# Altium PCB Power_Managment.PcbDoc (part 2 of 2)
Units mm, origin at the board's own origin, x right, y up, seen from the top; angles counter-clockwise.
Board outline 140 x 113 mm, 2 copper layers (Top Layer, Bottom Layer); 140 components, 107 nets, 489 pads, 1171 vias.
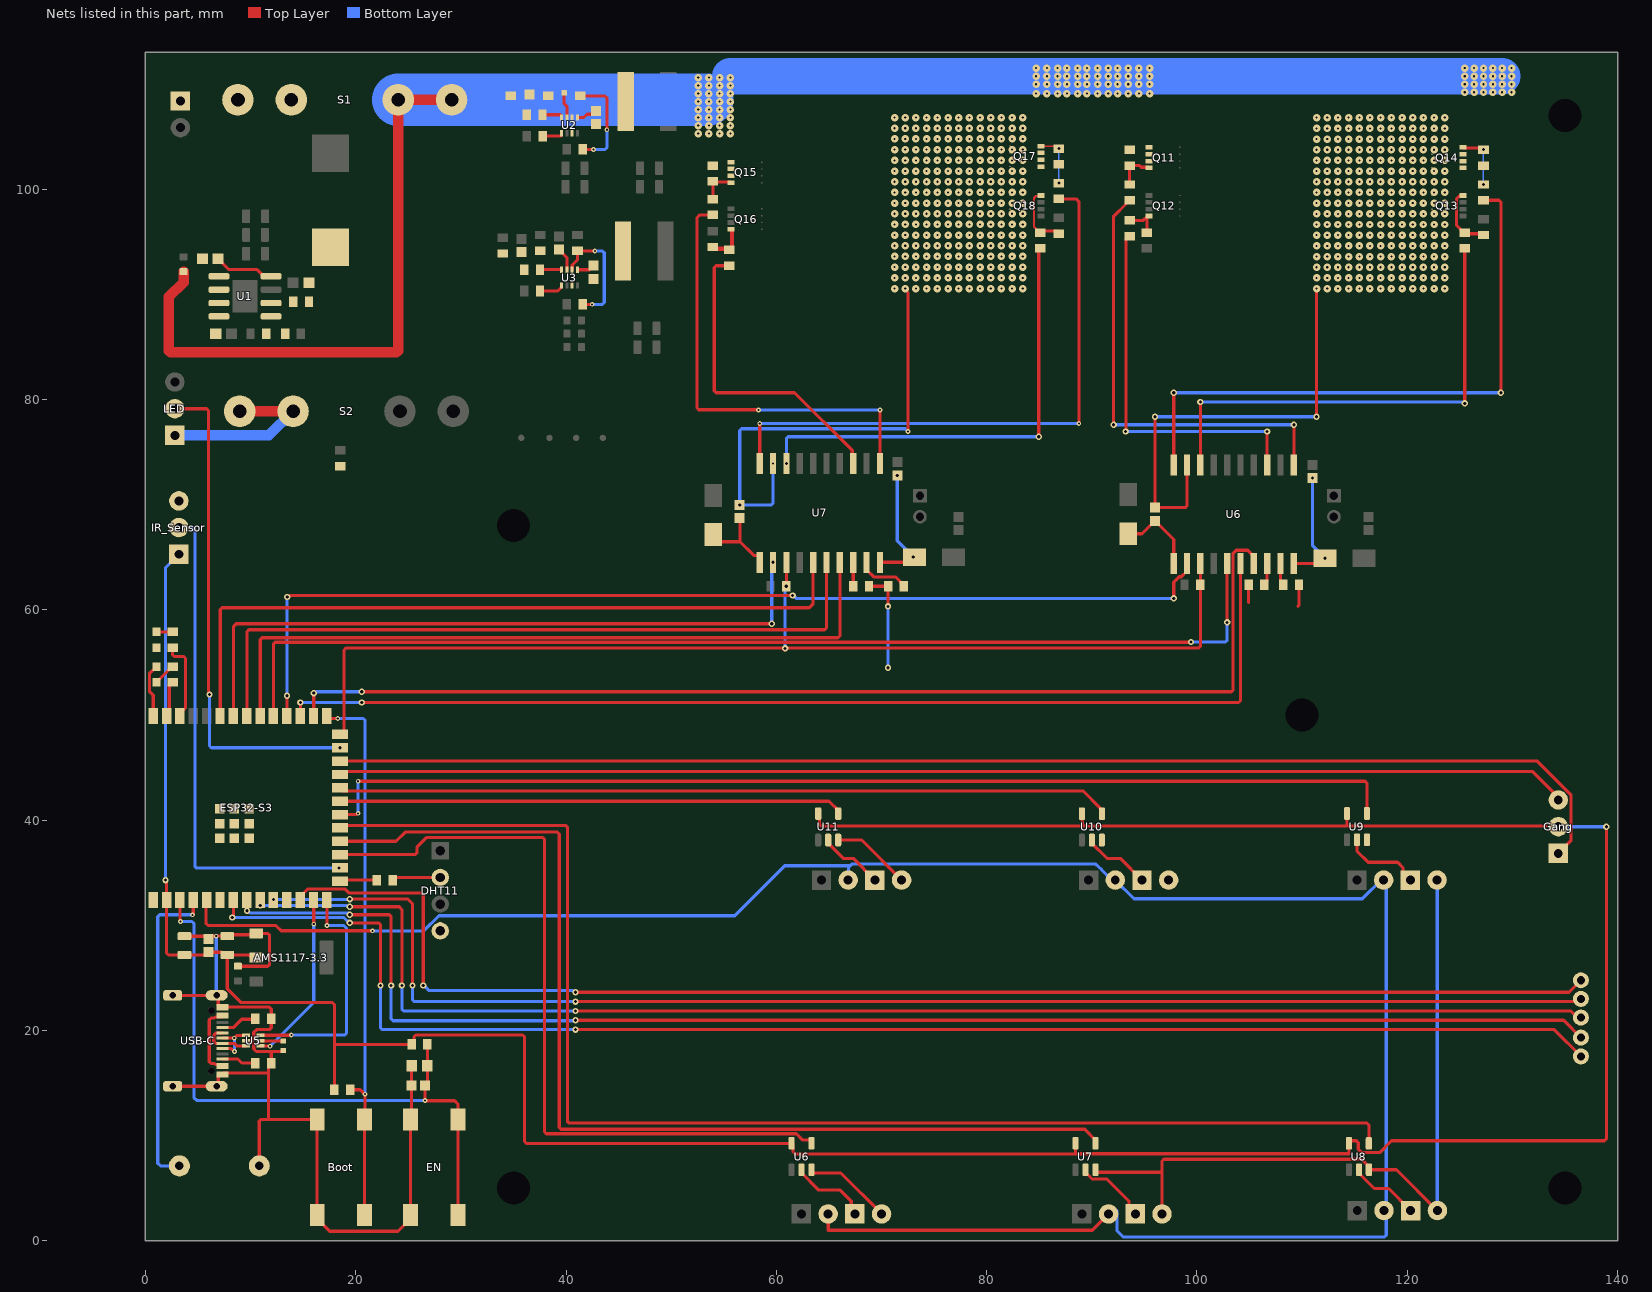
[diagram p2: the nets of this part, all layers, seen from the top]

## Via types
v1: diameter 0.711, hole 0.2, Top Layer to Bottom Layer, 988 vias
v2: diameter 0.45, hole 0.2, Top Layer to Bottom Layer, 96 vias
v3: diameter 0.6, hole 0.3, Top Layer to Bottom Layer, 87 vias

## Nets (pads, with @x,y where several pads share a name; then routed paths per layer and width w, separated by ;. In a path a pad name is that pad's centre, name@x,y a point inside that pad or via, vN(x,y) a via of type N, cw(c..) or ccw(c..) an arc to the next point about the centre after c; other vN are vias at no path point) (continued)
BHS: C43.1 Q13.5 Q13.6 Q13.7 Q13.8 Q14.5 Q14.6 Q14.7 Q14.8 U6.19 | length 43.2
  Top Layer w0.3: v3(96.012,78.359) C43.1@96.012,69.713 98.884,69.713 99.06,69.889 U6.19@99.06,73.789 ; v3(111.379,78.359) v1(111.379,90.544)
  Bottom Layer w0.3: v3(96.012,78.359) v3(111.379,78.359)
  other v1: 112.395,90.544 113.411,90.544 114.427,90.544 115.443,90.544 116.459,90.544 117.475,90.544 118.491,90.544 119.507,90.544 120.523,90.544 121.539,90.544 122.555,90.544 123.571,90.544 111.379,91.56 112.395,91.56 113.411,91.56 114.427,91.56 115.443,91.56 116.459,91.56 117.475,91.56 118.491,91.56 119.507,91.56 120.523,91.56 121.539,91.56 122.555,91.56 123.571,91.56 111.379,92.576 112.395,92.576 113.411,92.576 114.427,92.576 115.443,92.576 116.459,92.576 117.475,92.576 118.491,92.576 119.507,92.576 120.523,92.576 121.539,92.576 122.555,92.576 123.571,92.576 111.379,93.592 112.395,93.592 113.411,93.592 114.427,93.592 115.443,93.592 116.459,93.592 117.475,93.592 118.491,93.592 119.507,93.592 120.523,93.592 121.539,93.592 122.555,93.592 123.571,93.592 111.379,94.608 112.395,94.608 113.411,94.608 114.427,94.608 115.443,94.608 116.459,94.608 117.475,94.608 118.491,94.608 119.507,94.608 120.523,94.608 121.539,94.608 122.555,94.608 123.571,94.608 111.379,95.624 112.395,95.624 113.411,95.624 114.427,95.624 115.443,95.624 116.459,95.624 117.475,95.624 118.491,95.624 119.507,95.624 120.523,95.624 121.539,95.624 122.555,95.624 123.571,95.624 111.379,96.64 112.395,96.64 113.411,96.64 114.427,96.64 115.443,96.64 116.459,96.64 117.475,96.64 118.491,96.64 119.507,96.64 120.523,96.64 121.539,96.64 122.555,96.64 123.571,96.64 111.379,97.656 112.395,97.656 113.411,97.656 114.427,97.656 115.443,97.656 116.459,97.656 117.475,97.656 118.491,97.656 119.507,97.656 120.523,97.656 121.539,97.656 122.555,97.656 123.571,97.656 111.379,98.672 112.395,98.672 113.411,98.672 114.427,98.672 115.443,98.672 116.459,98.672 117.475,98.672 118.491,98.672 119.507,98.672 120.523,98.672 121.539,98.672 122.555,98.672 123.571,98.672 111.379,99.688 112.395,99.688 113.411,99.688 114.427,99.688 115.443,99.688 116.459,99.688 117.475,99.688 118.491,99.688 119.507,99.688 120.523,99.688 121.539,99.688 122.555,99.688 123.571,99.688 111.379,100.704 112.395,100.704 113.411,100.704 114.427,100.704 115.443,100.704 116.459,100.704 117.475,100.704 118.491,100.704 119.507,100.704 120.523,100.704 121.539,100.704 122.555,100.704 123.571,100.704 111.379,101.72 112.395,101.72 113.411,101.72 114.427,101.72 115.443,101.72 116.459,101.72 117.475,101.72 118.491,101.72 119.507,101.72 120.523,101.72 121.539,101.72 122.555,101.72 123.571,101.72 111.379,102.736 112.395,102.736 113.411,102.736 114.427,102.736 115.443,102.736 116.459,102.736 117.475,102.736 118.491,102.736 119.507,102.736 120.523,102.736 121.539,102.736 122.555,102.736 123.571,102.736 111.379,103.752 112.395,103.752 113.411,103.752 114.427,103.752 115.443,103.752 116.459,103.752 117.475,103.752 118.491,103.752 119.507,103.752 120.523,103.752 121.539,103.752 122.555,103.752 123.571,103.752 111.379,104.768 112.395,104.768 113.411,104.768 114.427,104.768 115.443,104.768 116.459,104.768 117.475,104.768 118.491,104.768 119.507,104.768 120.523,104.768 121.539,104.768 122.555,104.768 123.571,104.768 111.379,105.784 112.395,105.784 113.411,105.784 114.427,105.784 115.443,105.784 116.459,105.784 117.475,105.784 118.491,105.784 119.507,105.784 120.523,105.784 121.539,105.784 122.555,105.784 123.571,105.784 111.379,106.8 112.395,106.8 113.411,106.8 114.427,106.8 115.443,106.8 116.459,106.8 117.475,106.8 118.491,106.8 119.507,106.8 120.523,106.8 121.539,106.8 122.555,106.8 123.571,106.8
BHS1: C57.1 Q17.5 Q17.6 Q17.7 Q17.8 Q18.5 Q18.6 Q18.7 Q18.8 U7.19 | length 44
  Top Layer w0.3: C57.1@56.515,69.967 v3(56.515,69.977) ; v1(72.263,90.551) 72.263,90.44 72.517,90.186 v2(72.517,76.962)
  Bottom Layer w0.3: v2(59.69,73.914) 59.69,70.153 59.514,69.977 v3(56.515,69.977) 56.515,77.04 56.691,77.216 72.263,77.216 v2(72.517,76.962)
  other v1: 71.247,90.551 73.279,90.551 74.295,90.551 75.311,90.551 76.327,90.551 77.343,90.551 78.359,90.551 79.375,90.551 80.391,90.551 81.407,90.551 82.423,90.551 83.439,90.551 71.247,91.567 72.263,91.567 73.279,91.567 74.295,91.567 75.311,91.567 76.327,91.567 77.343,91.567 78.359,91.567 79.375,91.567 80.391,91.567 81.407,91.567 82.423,91.567 83.439,91.567 71.247,92.583 72.263,92.583 73.279,92.583 74.295,92.583 75.311,92.583 76.327,92.583 77.343,92.583 78.359,92.583 79.375,92.583 80.391,92.583 81.407,92.583 82.423,92.583 83.439,92.583 71.247,93.599 72.263,93.599 73.279,93.599 74.295,93.599 75.311,93.599 76.327,93.599 77.343,93.599 78.359,93.599 79.375,93.599 80.391,93.599 81.407,93.599 82.423,93.599 83.439,93.599 71.247,94.615 72.263,94.615 73.279,94.615 74.295,94.615 75.311,94.615 76.327,94.615 77.343,94.615 78.359,94.615 79.375,94.615 80.391,94.615 81.407,94.615 82.423,94.615 83.439,94.615 71.247,95.631 72.263,95.631 73.279,95.631 74.295,95.631 75.311,95.631 76.327,95.631 77.343,95.631 78.359,95.631 79.375,95.631 80.391,95.631 81.407,95.631 82.423,95.631 83.439,95.631 71.247,96.647 72.263,96.647 73.279,96.647 74.295,96.647 75.311,96.647 76.327,96.647 77.343,96.647 78.359,96.647 79.375,96.647 80.391,96.647 81.407,96.647 82.423,96.647 83.439,96.647 71.247,97.663 72.263,97.663 73.279,97.663 74.295,97.663 75.311,97.663 76.327,97.663 77.343,97.663 78.359,97.663 79.375,97.663 80.391,97.663 81.407,97.663 82.423,97.663 83.439,97.663 71.247,98.679 72.263,98.679 73.279,98.679 74.295,98.679 75.311,98.679 76.327,98.679 77.343,98.679 78.359,98.679 79.375,98.679 80.391,98.679 81.407,98.679 82.423,98.679 83.439,98.679 71.247,99.695 72.263,99.695 73.279,99.695 74.295,99.695 75.311,99.695 76.327,99.695 77.343,99.695 78.359,99.695 79.375,99.695 80.391,99.695 81.407,99.695 82.423,99.695 83.439,99.695 71.247,100.711 72.263,100.711 73.279,100.711 74.295,100.711 75.311,100.711 76.327,100.711 77.343,100.711 78.359,100.711 79.375,100.711 80.391,100.711 81.407,100.711 82.423,100.711 83.439,100.711 71.247,101.727 72.263,101.727 73.279,101.727 74.295,101.727 75.311,101.727 76.327,101.727 77.343,101.727 78.359,101.727 79.375,101.727 80.391,101.727 81.407,101.727 82.423,101.727 83.439,101.727 71.247,102.743 72.263,102.743 73.279,102.743 74.295,102.743 75.311,102.743 76.327,102.743 77.343,102.743 78.359,102.743 79.375,102.743 80.391,102.743 81.407,102.743 82.423,102.743 83.439,102.743 71.247,103.759 72.263,103.759 73.279,103.759 74.295,103.759 75.311,103.759 76.327,103.759 77.343,103.759 78.359,103.759 79.375,103.759 80.391,103.759 81.407,103.759 82.423,103.759 83.439,103.759 71.247,104.775 72.263,104.775 73.279,104.775 74.295,104.775 75.311,104.775 76.327,104.775 77.343,104.775 78.359,104.775 79.375,104.775 80.391,104.775 81.407,104.775 82.423,104.775 83.439,104.775 71.247,105.791 72.263,105.791 73.279,105.791 74.295,105.791 75.311,105.791 76.327,105.791 77.343,105.791 78.359,105.791 79.375,105.791 80.391,105.791 81.407,105.791 82.423,105.791 83.439,105.791 71.247,106.807 72.263,106.807 73.279,106.807 74.295,106.807 75.311,106.807 76.327,106.807 77.343,106.807 78.359,106.807 79.375,106.807 80.391,106.807 81.407,106.807 82.423,106.807 83.439,106.807
BOOT: Boot.1 Boot.2 ESP32-S3.27 R23.2 | length 52.5
  Top Layer w0.3: ESP32-S3.27@17.25,49.908 17.495,49.663 v2(18.288,49.663) ; R23.2@19.464,14.351 20.419,14.351 20.84,13.93 v2(20.881,13.93) 20.881,11.591 Boot.1@20.825,11.535 Boot.2@20.825,2.435
  Bottom Layer w0.3: v2(18.288,49.663) 20.705,49.663 20.881,49.487 v2(20.881,13.93)
"D 3V3": AMS1117-3.3.2 C26.2 C27.2 C28.2 ESP32-S3.2 Gang.2 IR_Sensor.1 R22.1 R23.1 U6.5@61.45,9.255 U7.5@88.45,9.255 U8.5 U9.5 U10.5 U11.5 | length 313.4
  Top Layer w0.3: v3(1.905,34.29) 1.905,34.209 2.01,34.104 ESP32-S3.2@2.01,32.408 2.01,27.342 2.186,27.166 C27.2@3.716,27.166 5.736,27.166 C28.2@6.002,27.432 7.255,27.432 7.51,27.177 C26.2@7.78,27.177 ; AMS1117-3.3.2@10.531,26.67 10.341,26.67 9.834,27.177 C26.2@7.78,27.177 ; R23.1@17.964,14.351 17.964,18.636 ; U11.5@63.98,40.61 64.11,40.48 64.11,39.602 64.286,39.427 113.836,39.427 113.847,39.438 114.127,39.438 ; U7.5@88.45,9.255 88.45,8.28 88.425,8.255 ; 89.06,39.915 U10.5@89.06,40.61 ; 89.111,39.546 89.111,39.864 ; U9.5@114.272,40.625 114.272,39.583 114.127,39.438 ; Gang.2@133.985,39.624 133.799,39.438 114.127,39.438 ; v3(138.938,39.37) 138.938,9.676 138.762,9.5 118.5,9.5 117.373,8.373 115.678,8.373 115.345,8.706 115.345,9.324 115.169,9.5 114.595,9.5 114.45,9.355 114.45,8.265 88.91,8.265 88.9,8.255 88.425,8.255 ; C26.2@7.78,27.177 7.78,23.97 9.11,22.64 17.788,22.64 17.964,22.464 17.964,18.636 ; 17.964,18.636 17.997,18.669 R22.1@25.318,18.669 25.541,18.892 25.541,19.382 25.717,19.558 35.874,19.558 36.05,19.382 36.05,9.431 36.226,9.255 U6.5@61.45,9.255 61.595,9.11 61.595,8.431 61.771,8.255 88.425,8.255
  Bottom Layer w0.3: v3(1.905,34.29) 1.905,64.008 IR_Sensor.1@3.175,65.278 ; Gang.2@134.366,39.37 v3(138.938,39.37)
D+: U5.1 USB-C.A6 USB-C.B6 | length 4.8
  Top Layer w0.3: USB-C.B6@7.344,18.259 8.149,18.259 8.425,17.983 v2(8.466,17.983) ; USB-C.A6@7.344,19.259 v2@8.441,19.259 ; v2@8.442,19.26 8.703,19.521 U5.1@9.575,19.521
  Bottom Layer w0.3: v2@8.453,17.996 v2@8.453,19.249
  other v2: 8.441,19.261
D++: ESP32-S3.14 U5.6 | length 22.6
  Top Layer w0.3: U5.6@10.955,19.521 10.974,19.539 13.857,19.539 v2(13.876,19.558) ; ESP32-S3.14@17.25,32.408 17.25,29.994 v2(17.272,29.972)
  Bottom Layer w0.3: v2(13.876,19.558) 18.946,19.558 19.122,19.734 19.122,29.719 18.869,29.972 v2(17.272,29.972)
D-: U5.3 USB-C.A7 USB-C.B7 | length 4.8
  Top Layer w0.3: USB-C.B7@7.344,19.759 6.727,19.759 6.492,19.524 6.492,18.96 6.693,18.759 8.44,18.759 8.678,18.521 U5.3@9.575,18.521
D--: ESP32-S3.13 U5.4 | length 16.6
  Top Layer w0.3: U5.4@10.955,18.521 10.97,18.506 11.828,18.506 v2(11.844,18.49) ; ESP32-S3.13@15.98,32.408 16.002,32.386 v2(16.002,30.099)
  Bottom Layer w0.3: v2(11.844,18.49) 16.002,22.648 v2(16.002,30.099)
DGND: AMS1117-3.3.1 Boot.3 Boot.4 C23.2 C24.2 C25.1 C26.1 C27.1 C28.1 C29.1 D1.2 D2.2 DHT11.4 EN.3 EN.4 ESP32-S3.1 ESP32-S3.40 ESP32-S3.41 ESP32-S3.42 ESP32-S3.43 ESP32-S3.44 ESP32-S3.45 ESP32-S3.46 ESP32-S3.47 ESP32-S3.48 ESP32-S3.49 IR_Sensor.3 J2.2 J4.2 J6.2 J8.2 J10.2 J12.2 LS1.N R01.1 R20.1 R21.2 R40.2 R41.2 R60.2 R61.2 U5.2 U6.3@63.35,6.745 U7.3@90.35,6.745 U8.3 U9.3 U10.3 U11.3 USB-C.A1_B12 USB-C.B1_A12 USB-C.SH1 USB-C.SH2 USB-C.SH3 USB-C.SH4 | length 206.3
  Top Layer w0.3: ESP32-S3.1@0.74,32.408 ESP32-S3.1@0.74,32.708 ; ESP32-S3.40@0.74,49.908 0.74,51.876 0.372,52.244 0.372,53.921 D2.2@1.049,54.598 ; USB-C.SH4@2.589,14.689 USB-C.SH2@6.769,14.689 6.919,14.839 6.919,15.659 7.069,15.809 USB-C.B1_A12@7.344,15.809 7.494,15.959 11.603,15.959 11.717,16.073 ; USB-C.SH3@2.589,23.329 USB-C.SH1@6.769,23.329 6.919,23.179 6.919,22.359 7.069,22.209 11.783,22.209 11.959,22.033 R20.1@11.959,21.082 11.959,20.242 11.783,20.066 10.566,20.066 10.303,19.803 10.303,19.301 9.998,18.996 ; C27.1@3.716,28.956 5.728,28.956 C28.1@6.002,28.682 6.276,28.956 v2(6.731,28.956) ; v2@6.731,28.967 C26.1@7.78,28.967 7.903,29.091 10.408,29.091 AMS1117-3.3.1@10.531,29.214 11.635,29.214 11.811,29.038 11.811,26.289 11.622,26.1 C25.1@8.796,26.1 ; U5.2@9.575,19.021 9.6,18.996 9.998,18.996 ; LS1.N@10.828,7.112 10.828,11.359 11.004,11.535 11.717,11.535 ; C29.1@13.114,18.092 13.014,17.992 12.817,17.992 12.813,17.988 11.959,17.988 ; C23.2@25.343,16.637 25.316,16.61 C24.2@25.316,14.732 25.316,11.636 EN.3@25.215,11.535 EN.4@25.215,2.435 25.215,2.085 24.019,0.889 17.521,0.889 16.325,2.085 Boot.4@16.325,2.435 Boot.3@16.325,11.535 11.717,11.535 ; DHT11.4@27.792,29.222 DHT11.4@28.034,29.464 ; U6.3@63.35,6.745 63.35,6.582 63.495,6.437 66.113,6.437 J2.2@70.01,2.54 ; U11.3@65.88,38.1 68.105,38.1 J10.2@71.915,34.29 ; R60.2@68.81,62.23 R61.2@70.624,62.23 70.618,62.224 70.618,60.331 v3(70.612,60.325) ; U7.3@90.35,6.745 90.35,6.643 90.495,6.498 96.68,6.498 ; J4.2@96.68,2.54 96.68,6.498 ; 104.902,60.706 104.914,60.718 R40.2@104.914,62.357 ; 109.601,60.325 109.704,60.428 R41.2@109.704,62.357 ; J6.2@122.87,2.86 118.985,6.745 U8.3@116.35,6.745 116.35,7.055 115.658,7.747 96.856,7.747 96.68,7.571 96.68,6.498 ; 9.998,18.996 10.021,18.973 10.057,18.973 10.303,18.727 10.303,18.239 10.554,17.988 11.959,17.988 ; 11.717,11.535 11.717,16.073 ; 11.717,16.073 11.717,16.649 R21.2@11.959,16.891 11.959,17.988
  Bottom Layer w0.3: v2(6.731,28.956) 6.731,23.367 USB-C.SH1@6.769,23.329 ; v3(70.612,54.483) v3(70.612,60.325) ; J8.2@122.842,34.29 122.856,34.276 122.856,2.874 J6.2@122.87,2.86
"Echo 1": J2.1 U6.2@62.4,6.745 | length 7.5
  Top Layer w0.3: U6.2@62.4,6.745 62.4,6.435 64.032,4.803 66.064,4.803 67.127,3.739 67.127,2.883 J2.1@67.47,2.54
"Echo 2": J4.1 U7.2@89.4,6.745 | length 7
  Top Layer w0.3: U7.2@89.4,6.745 89.4,6.435 89.545,6.29 89.602,6.29 89.778,6.114 89.778,6.112 90.027,5.863 91.419,5.863 93.543,3.739 93.543,3.137 J4.1@94.14,2.54
"Echo 3": J6.1 U8.2 | length 6.7
  Top Layer w0.3: U8.2@115.4,6.745 115.4,6.435 116.873,4.962 118.228,4.962 J6.1@120.33,2.86
"Echo 4": J8.1 U9.2 | length 7.6
  Top Layer w0.3: U9.2@115.222,38.115 115.222,37.043 116.283,35.982 119.085,35.982 119.596,35.471 119.596,34.996 J8.1@120.302,34.29
"Echo 5": J10.1 U11.2 | length 6.2
  Top Layer w0.3: U11.2@64.93,38.1 64.93,37.79 66.365,36.355 67.31,36.355 J10.1@69.375,34.29
"Echo 6": J12.1 U10.2 | length 6.5
  Top Layer w0.3: U10.2@90.01,38.1 90.01,37.79 91.445,36.355 92.71,36.355 J12.1@94.775,34.29
EN: C23.1 C24.1 EN.1 EN.2 ESP32-S3.3 R22.2 | length 61.4
  Top Layer w0.3: ESP32-S3.3@3.28,32.408 3.28,30.449 3.335,30.394 v2(3.335,30.353) ; R22.2@26.818,18.669 26.818,14.984 C24.1@26.566,14.732 26.576,14.722 v2(26.576,13.335) 26.605,13.306 29.399,13.306 29.715,12.99 EN.2@29.715,2.435
  Bottom Layer w0.3: v2(3.335,30.353) 4.429,30.353 4.605,30.177 4.605,13.603 4.873,13.335 v2(26.576,13.335)
HSA: R47.1 U6.11 | length 43
  Top Layer w0.3: v3(92.075,77.597) 92.075,97.421 93.249,98.595 93.249,98.695 93.499,98.945 R47.1@93.599,98.945 ; U6.11@109.22,73.789 v3(109.22,77.597)
  Bottom Layer w0.3: v3(92.075,77.597) v3(109.22,77.597)
HSA1: R51.1 U7.11 | length 42.3
  Top Layer w0.3: R51.1@53.975,97.56 52.729,97.56 52.451,97.282 52.451,79.198 52.627,79.023 58.264,79.023 v2(58.293,78.994) ; U7.11@69.85,73.915 v2(69.85,78.994)
  Bottom Layer w0.3: v2(58.293,78.994) v2(69.85,78.994)
HSB: R49.2 U6.20 | length 57.8
  Top Layer w0.3: U6.20@97.79,73.789 v3(97.79,80.645) ; R49.2@127.254,98.945 128.729,98.945 128.905,98.769 v3(128.905,80.645)
  Bottom Layer w0.3: v3(97.79,80.645) v3(128.905,80.645)
HSB1: R56.2 U7.20 | length 57.3
  Top Layer w0.3: U7.20@58.42,73.915 v2(58.42,77.718) ; R56.2@86.868,99.072 88.512,99.072 88.773,98.811 v2(88.773,77.724)
  Bottom Layer w0.3: v2(58.42,77.718) 58.423,77.721 88.77,77.721 v2(88.773,77.724)
IO1: ESP32-S3.39 R25.1 | length 3.4
  Top Layer w0.3: ESP32-S3.39@2.264,49.908 2.264,52.848 2.514,53.098 R25.1@2.573,53.098
IO2: ESP32-S3.38 R24.1 | length 7.8
  Top Layer w0.3: R24.1@2.573,56.4 2.573,55.726 2.749,55.55 3.634,55.55 3.81,55.374 3.81,50.684 3.634,50.508 3.58,50.508 3.28,50.208 ESP32-S3.38@3.28,49.908
IO3: ESP32-S3.15 R30.2 | length 3.6
  Top Layer w0.3: ESP32-S3.15@18.5,34.173 18.617,34.29 R30.2@22.004,34.29
IO4: ESP32-S3.4 LS1.P | length 30.4
  Top Layer w0.3: v2(4.478,30.988) 4.478,31.029 4.55,31.101 ESP32-S3.4@4.55,32.408
  Bottom Layer w0.3: LS1.P@3.228,7.112 1.43,7.112 1.176,7.366 1.176,30.812 1.352,30.988 v2(4.478,30.988)
IO6: ESP32-S3.6
IO7: ESP32-S3.7 pad.6 | length 141.2
  Top Layer w0.3: v3(8.255,30.734) 8.255,30.815 8.36,30.92 ESP32-S3.7@8.36,32.408 ; v3(19.431,30.226) 22.176,30.226 22.352,30.05 v3(22.352,24.257) ; v3(40.894,20.066) 133.985,20.066 pad.6@136.525,17.526
  Bottom Layer w0.3: v3(8.255,30.734) 18.869,30.734 19.377,30.226 v3(19.431,30.226) ; v3(22.352,24.257) 22.352,20.242 22.528,20.066 v3(40.894,20.066)
IO8: ESP32-S3.12 pad.2 | length 132
  Top Layer w0.3: ESP32-S3.12@14.71,32.408 14.71,32.708 15.222,33.22 15.222,33.242 15.415,33.435 19.016,33.435 19.397,33.054 26.24,33.054 26.416,32.878 v3(26.416,24.257) ; v3(40.894,23.622) 135.382,23.622 pad.2@136.525,24.765
  Bottom Layer w0.3: v3(26.416,24.257) 26.497,24.257 26.979,23.775 40.659,23.775 40.813,23.622 v3(40.894,23.622)
IO9: ESP32-S3.17 U6.4@63.35,9.255 | length 74.3
  Top Layer w0.3: ESP32-S3.17@18.5,36.713 25.638,36.713 25.814,36.889 25.814,37.406 26.762,38.354 37.774,38.354 37.95,38.178 37.95,10.336 38.126,10.16 61.922,10.16 62.519,9.563 63.205,9.563 63.35,9.417 U6.4@63.35,9.255
IO10: ESP32-S3.18 U7.4@90.35,9.255 | length 101
  Top Layer w0.3: ESP32-S3.18@18.5,37.983 23.825,37.983 24.694,38.851 39.178,38.851 39.354,38.676 39.354,10.763 39.529,10.587 89.328,10.587 90.35,9.565 U7.4@90.35,9.255
IO11: ESP32-S3.19 U8.4 | length 127.9
  Top Layer w0.3: ESP32-S3.19@18.5,39.253 18.744,39.497 39.956,39.497 40.132,39.321 40.132,11.352 40.308,11.176 116.174,11.176 116.35,11 U8.4@116.35,9.255
IO12: ESP32-S3.20 U9.4 | length 103.7
  Top Layer w0.3: ESP32-S3.20@18.5,40.523 20.068,40.523 20.185,40.64 v2(20.226,40.64) ; v2(20.226,43.688) 115.996,43.688 116.172,43.512 U9.4@116.172,40.625
  Bottom Layer w0.3: v2(20.226,40.64) v2(20.226,43.688)
IO13: ESP32-S3.21 U11.4 | length 48.1
  Top Layer w0.3: ESP32-S3.21@18.5,41.793 65.007,41.793 65.88,40.92 U11.4@65.88,40.61
IO14: ESP32-S3.22 U10.4 | length 73.7
  Top Layer w0.3: ESP32-S3.22@18.5,43.063 18.8,42.763 89.19,42.763 90.815,41.138 90.815,40.755 U10.4@90.96,40.61
IO15: ESP32-S3.8 pad.5 | length 137.4
  Top Layer w0.3: v3(19.431,30.988) 23.192,30.988 23.368,30.812 v3(23.368,24.257) ; v3(40.894,20.955) 134.874,20.955 pad.5@136.525,19.304
  Bottom Layer w0.3: v3@9.68,31.369 9.733,31.369 9.929,31.173 v3@19.304,31.173 ; v3(23.368,24.257) 23.368,21.093 23.544,20.917 40.856,20.917 v3(40.894,20.955)
  other v3: 9.652,31.369
IO16: ESP32-S3.9 pad.4 | length 135.6
  Top Layer w0.3: v3(19.431,31.75) 24.13,31.75 24.384,31.496 v3(24.384,24.257) ; v3(40.894,21.844) 135.559,21.844 136.194,21.209 pad.4@136.525,21.209
  Bottom Layer w0.3: v3(10.922,31.877) 19.105,31.877 19.175,31.807 19.374,31.807 v3(19.431,31.75) ; v3(24.384,24.257) 24.384,22.02 24.56,21.844 v3(40.894,21.844)
IO17: ESP32-S3.10 pad.3 | length 133.9
  Top Layer w0.3: v3(19.431,32.477) 24.97,32.477 25.4,32.047 v3(25.4,24.257) ; v3(40.894,22.733) 135.737,22.733 135.757,22.753 136.291,22.753 pad.3@136.525,22.987
  Bottom Layer w0.3: v3(12.192,32.454) 12.215,32.431 19.385,32.431 v3(19.431,32.477) ; v3(25.4,24.257) 25.4,22.909 25.576,22.733 v3(40.894,22.733)
IO18: ESP32-S3.11 | length 0.2
  Top Layer w0.3: ESP32-S3.11@13.44,32.408 ESP32-S3.11@13.589,32.557
IO21: ESP32-S3.23 Gang.3 | length 117.3
  Top Layer w0.3: ESP32-S3.23@18.5,44.333 18.8,44.633 131.904,44.633 132.08,44.457 132.08,44.45 134.366,42.164 Gang.3@134.366,41.91
IO35: ESP32-S3.28 U6.7 | length 105.8
  Top Layer w0.3: ESP32-S3.28@15.98,49.908 16.002,49.93 v3(16.002,52.07) ; v3(20.574,52.197) 103.271,52.197 103.447,52.373 103.447,65.388 103.725,65.666 104.833,65.666 105.41,65.089 U6.7@105.41,64.389
  Bottom Layer w0.3: v3(16.002,52.07) 16.083,52.07 16.21,52.197 v3(20.574,52.197)
IO36: ESP32-S3.29 U6.6 | length 103.8
  Top Layer w0.3: ESP32-S3.29@14.71,49.908 14.732,49.93 v3(14.732,51.181) ; v3(20.574,51.181) 103.964,51.181 104.14,51.357 U6.6@104.14,64.389
  Bottom Layer w0.3: v3(14.732,51.181) v3(20.574,51.181)
IO37: ESP32-S3.30 U6.2@99.06,64.389 | length 99.7
  Top Layer w0.3: ESP32-S3.30@13.44,49.908 13.462,49.93 v3(13.462,51.816) ; v3(13.479,61.215) 13.56,61.215 13.697,61.352 v3(61.547,61.352) ; v3(97.79,61.087) 97.79,62.621 98.303,63.134 98.505,63.134 99.06,63.689 U6.2@99.06,64.389
  Bottom Layer w0.3: v3(13.462,51.816) 13.471,51.825 13.471,61.207 v3(13.479,61.215) ; v3(61.547,61.352) 61.628,61.352 61.893,61.087 v3(97.79,61.087)
IO38: ESP32-S3.31 U6.5@102.87,64.389 | length 105
  Top Layer w0.3: ESP32-S3.31@12.17,49.908 12.17,56.731 12.346,56.907 99.417,56.907 v3(99.441,56.931) ; v3(102.87,58.801) U6.5@102.87,64.389
  Bottom Layer w0.3: v3(99.441,56.931) 102.694,56.931 102.87,57.107 v3(102.87,58.801)
IO39: ESP32-S3.32 U7.7 | length 69.5
  Top Layer w0.3: ESP32-S3.32@10.9,49.908 10.922,49.93 10.922,57.158 11.098,57.334 65.864,57.334 66.04,57.51 U7.7@66.04,64.515
IO40: ESP32-S3.33 U7.6 | length 69.5
  Top Layer w0.3: ESP32-S3.33@9.63,49.908 9.652,49.93 9.652,57.912 9.837,58.097 64.594,58.097 64.77,58.273 U7.6@64.77,64.515
IO41: ESP32-S3.34 U7.2@59.69,64.515 | length 65.7
  Top Layer w0.3: ESP32-S3.34@8.36,49.908 8.382,49.93 8.382,58.42 8.636,58.674 v3(59.563,58.674)
  Bottom Layer w0.3: v3(59.563,58.674) 59.563,64.308 59.69,64.435 v3(59.69,64.516)
IO42: ESP32-S3.35 U7.5@63.5,64.515 | length 70.7
  Top Layer w0.3: ESP32-S3.35@7.09,49.908 7.112,49.93 7.112,60.022 7.288,60.198 63.119,60.198 63.5,60.579 U7.5@63.5,64.515
IO45: ESP32-S3.26 R42.2 R62.2 U6.3@100.33,64.389 U7.3@60.96,64.515 | length 106
  Top Layer w0.3: ESP32-S3.26@18.5,48.143 18.589,48.143 18.889,48.443 18.889,56.178 19.065,56.354 60.602,56.354 60.752,56.204 v3@60.833,56.204 ; v3(60.833,56.33) 60.857,56.354 100.154,56.354 100.33,56.53 100.33,62.357 U6.3@100.33,64.389 ; v3(60.948,62.23) 60.954,62.236 60.954,64.509 U7.3@60.96,64.515
  Bottom Layer w0.3: v3(60.833,56.33) 60.833,62.034 60.948,62.149 v3(60.948,62.23)
IO46: ESP32-S3.16 IR_Sensor.2 | length 47.5
  Top Layer w0.3: v3(18.415,35.433) 18.425,35.443 ESP32-S3.16@18.5,35.443
  Bottom Layer w0.3: IR_Sensor.2@3.175,67.818 4.523,67.818 4.699,67.642 4.699,35.609 4.875,35.433 v3(18.415,35.433)
IO47: ESP32-S3.24 Gang.1 | length 124.5
  Top Layer w0.3: ESP32-S3.24@18.5,45.603 132.373,45.603 135.568,42.408 135.568,38.032 Gang.1@134.366,36.83
IO48: ESP32-S3.25 LED.2 | length 47.9
  Top Layer w0.3: LED.2@2.617,79.121 5.811,79.121 5.987,78.945 5.987,52.264 6.039,52.213 6.039,52 v3(6.096,51.943)
  Bottom Layer w0.3: v3(6.096,51.943) 6.096,47.049 6.272,46.873 v3(18.5,46.873)
LSA: R48.1 U6.13 | length 35.4
  Top Layer w0.3: v3(93.218,76.962) 93.249,76.993 93.249,95.278 93.499,95.528 R48.1@93.599,95.528 ; U6.13@106.68,73.789 v3(106.68,76.962)
  Bottom Layer w0.3: v3(93.218,76.962) v3(106.68,76.962)
LSA1: R53.1 U7.13 | length 29.9
  Top Layer w0.3: R53.1@55.499,92.722 54.278,92.722 54.102,92.546 54.102,80.821 54.278,80.645 61.733,80.645 67.218,75.159 67.218,74.007 U7.13@67.31,73.915
LSB: R50.2 U6.18 | length 45.9
  Top Layer w0.3: U6.18@100.33,73.789 v3(100.33,79.756) ; v3(125.476,79.629) R50.2@125.476,94.373
  Bottom Layer w0.3: v3(100.33,79.756) 125.268,79.756 125.395,79.629 v3(125.476,79.629)
LSB1: R58.2 U7.18 | length 44.6
  Top Layer w0.3: R58.2@84.938,94.576 84.963,94.551 v3(84.963,76.454)
  Bottom Layer w0.3: v3(60.96,73.914) 60.96,76.278 61.136,76.454 v3(84.963,76.454)
"NetAkku Connector_1": "Akku Connector.1" S1.1
NetC2_2: C2.2 U1.4
NetC3_2: C3.2 R1.2
NetC4_1: C4.1 L1.1 U1.8 | length 5.7
  Top Layer w0.3: C4.1@6.914,93.364 6.939,93.364 7.949,92.354 10.615,92.354 11.256,91.713 U1.8@11.941,91.713
NetC4_2: C4.2 U1.1
NetC10_2: C10.2 U2.7 | length 2.5
  Top Layer w0.3: C10.2@39.819,109.17 39.819,108.141 40.077,107.883 U2.7@40.077,106.812
NetC11_1: C11.1 U2.5 | length 2.1
  Top Layer w0.3: U2.5@41.077,106.812 41.687,106.812 42.002,107.126 42.542,107.126 C11.1@42.867,107.451
NetC11_2: C11.2 L2.1 U2.3
NetC14_1: C14.1 R6.1 R8.2 R9.2
NetC18_2: C18.2 U3.7 | length 2.2
  Top Layer w0.3: C18.2@39.311,94.263 40.077,93.497 U3.7@40.077,92.334
NetC19_1: C19.1 U3.5 | length 1.7
  Top Layer w0.3: U3.5@41.077,92.334 42.228,92.334 C19.1@42.613,92.719
NetC19_2: C19.2 L3.1 U3.3
NetC22_2: C22.2 R12.2 R14.1 R15.1
NetC29_2: C29.2 U5.5 | length 2.2
  Top Layer w0.3: U5.5@10.955,19.021 10.98,18.996 11.31,18.996 11.314,18.992 12.813,18.992 12.84,18.965 C29.2@13.114,18.965
NetC42_2: C42.2 D40.1 U6.10 | length 10.6
  Top Layer w0.3: U6.10@109.22,64.389 D40.1@111.682,64.389 ; v3(110.998,72.517) C42.2@110.998,72.527
  Bottom Layer w0.3: v3(110.998,72.517) 110.998,66.088 v3(112.189,64.897)
NetC43_2: C43.2 D41.1 U6.1@97.79,64.389 | length 7.9
  Top Layer w0.3: D41.1@93.472,67.231 94.78,67.231 C43.2@96.012,68.463 97.79,66.685 U6.1@97.79,64.389
NetC56_2: C56.2 D50.1 U7.10 | length 11.8
  Top Layer w0.3: U7.10@69.85,64.515 72.516,64.515 v3(73.025,65.024) ; v3(71.501,72.771) C56.2@71.501,72.781
  Bottom Layer w0.3: v3(71.501,72.771) 71.501,66.548 v3(73.025,65.024)
NetC57_2: C57.2 D51.1 U7.1@58.42,64.515 | length 8.8
  Top Layer w0.3: D51.1@53.721,67.612 54.335,66.998 54.335,66.621 54.483,66.473 56.54,66.473 ; C57.2@56.515,68.717 56.54,68.692 56.54,66.473 ; U7.1@58.42,64.515 58.42,65.017 58.27,65.167 57.846,65.167 56.54,66.473
NetD1_1: D1.1 R24.2 | length 1.5
  Top Layer w0.3: D1.1@1.049,57.9 R24.2@2.573,57.9
NetD2_1: D2.1 R25.2 | length 2.2
  Top Layer w0.3: D2.1@1.049,53.098 2.223,54.272 2.223,54.348 2.473,54.598 R25.2@2.573,54.598
NetDHT11_2: DHT11.2 R30.1 | length 4.6
  Top Layer w0.3: R30.1@23.504,34.29 23.504,34.294 23.754,34.544 DHT11.2@28.034,34.544
NetLED_1: LED.1 S2.2 | length 17.7
  Top Layer w1: S2.2@8.961,78.878 S2.2@14.041,78.878
  Bottom Layer w1: LED.1@2.385,76.581 11.744,76.581 S2.2@14.041,78.878
NetQ11_4: Q11.4 R43.1 R47.2 | length 3.7
  Top Layer w0.3: R47.2@93.599,100.445 R43.1@93.599,102.247 94.549,102.247 94.708,102.088 95.365,102.088 Q11.4@95.431,102.022
NetQ12_4: Q12.4 R44.1 R48.2 | length 3.5
  Top Layer w0.3: R48.2@93.599,97.028 94.895,97.028 Q12.4@95.251,97.384 ; R44.1@95.25,95.873 Q12.4@95.25,97.269 ; Q12.4@95.251,97.27 Q12.4@95.251,97.384 ; Q12.4@95.431,97.45 95.317,97.45 Q12.4@95.251,97.384
NetQ13_4: Q13.4 R46.1 R50.1 | length 6.2
  Top Layer w0.3: Q13.4@125.295,99.4 125.229,99.334 124.941,99.334 124.688,99.081 124.688,96.561 125.376,95.873 R50.1@125.476,95.873 125.591,95.758 127.139,95.758 R46.1@127.254,95.643
NetQ14_4: Q14.4 R45.1 R49.1 | length 5.4
  Top Layer w0.127: R49.1@127.254,100.445 v3(127.254,100.457)
  Top Layer w0.3: Q14.4@125.295,103.972 125.361,103.906 127.107,103.906 v3(127.254,103.759)
  Bottom Layer w0.127: v3(127.254,100.457) v3(127.254,103.759)
NetQ15_4: Q15.4 R51.2 R52.1 | length 3.4
  Top Layer w0.3: R51.2@53.975,99.06 R52.1@53.975,100.735 54.03,100.68 55.625,100.68 Q15.4@55.68,100.625
NetQ16_4: Q16.4 R53.2 R54.1 | length 3.6
  Top Layer w0.4: R54.1@53.975,94.5 54.139,94.336 55.385,94.336 R53.2@55.499,94.222 ; Q16.4@55.68,96.18 55.764,96.18 55.78,96.164 R53.2@55.78,94.31
NetQ17_4: Q17.4 R55.1 R56.1 | length 5.1
  Top Layer w0.127: Q17.4@85.163,104.099 86.631,104.099 v3(86.868,103.862)
  Bottom Layer w0.127: v3(86.868,100.572) v3(86.868,103.862)
NetQ18_4: Q18.4 R57.1 R58.1 | length 6
  Top Layer w0.203: R58.1@84.938,96.076 84.838,96.076 84.503,96.411 84.503,99.168 84.696,99.362 85.023,99.362 Q18.4@85.138,99.476
  Top Layer w0.3: R58.1@84.938,96.076 84.995,96.019 86.785,96.019 R57.1@86.843,95.961
NetR1_1: R1.1 U1.6
NetR2_1: R2.1 R3.1 U1.5
NetR4_1: R4.1 R5.2 U2.6 | length 9.7
  Top Layer w0.3: R5.2@41.343,108.87 41.349,108.864 43.707,108.864 43.883,108.688 v2(43.883,105.652) ; R4.1@41.585,103.778 v2(42.613,103.778)
  Bottom Layer w0.3: v2(42.613,103.778) 43.707,103.778 43.883,103.954 v2(43.883,105.652)
NetR6_2: R6.2 U2.8 | length 2
  Top Layer w0.3: R6.2@37.763,107.08 39.452,107.08 39.577,106.955 U2.8@39.577,106.812
NetR7_2: R7.2 U2.1 | length 2
  Top Layer w0.3: R7.2@37.775,105.048 39.452,105.048 39.577,105.173 U2.1@39.577,105.316
NetR10_2: R10.2 R11.1 U3.6 | length 11.5
  Top Layer w0.3: U3.6@40.577,92.334 40.587,92.344 40.587,92.786 41.089,93.288 R11.1@41.089,94.138 41.095,94.132 42.734,94.132 v2(42.74,94.126) ; R10.2@41.585,89.046 v2(42.486,89.046)
  Bottom Layer w0.3: v2(42.486,89.046) 43.453,89.046 43.629,89.222 43.629,93.95 43.453,94.126 v2(42.74,94.126)
NetR12_1: R12.1 U3.8 | length 2.1
  Top Layer w0.3: R12.1@37.521,92.348 39.567,92.348 39.577,92.338 U3.8@39.577,92.334
NetR13_1: R13.1 U3.1 | length 2.4
  Top Layer w0.3: R13.1@37.521,90.316 39.198,90.316 39.577,90.695 U3.1@39.577,90.838
NetR20_2: R20.2 USB-C.A5 | length 3.5
  Top Layer w0.3: USB-C.A5@7.344,20.259 8.354,20.259 9.15,21.055 10.432,21.055 R20.2@10.459,21.082
NetR21_1: R21.1 USB-C.B5 | length 3.3
  Top Layer w0.3: USB-C.B5@7.344,17.259 8.805,17.259 9.173,16.891 R21.1@10.459,16.891
NetR40_1: R40.1 U6.8 | length 2.1
  Top Layer w0.3: R40.1@106.414,62.357 106.414,62.457 106.68,62.723 U6.8@106.68,64.389
NetR41_1: R41.1 U6.9 | length 2.1
  Top Layer w0.3: U6.9@107.95,64.389 107.95,62.939 107.954,62.935 107.954,62.607 R41.1@108.204,62.357
NetR60_1: R60.1 U7.8 | length 2.3
  Top Layer w0.3: R60.1@67.31,62.23 U7.8@67.31,64.515
NetR61_1: R61.1 U7.9 | length 5
  Top Layer w0.3: U7.9@68.58,64.515 68.58,63.815 69.272,63.123 71.332,63.123 72.124,62.33 R61.1@72.124,62.23
Trigger: ESP32-S3.5 J1.2 J3.2 J5.2 J7.2 J9.2 J11.2 | length 211.3
  Top Layer w0.3: ESP32-S3.5@5.82,32.408 5.748,32.336 5.748,30.193 5.969,29.972 12.401,29.972 12.903,29.47 21.584,29.47 v2(21.59,29.464) ; J1.2@64.93,2.54 64.93,0.996 90.056,0.996 J3.2@91.6,2.54
  Bottom Layer w0.3: v2(21.59,29.464) 26.475,29.464 27.912,30.902 56.048,30.902 60.798,35.652 67.021,35.652 ; J9.2@66.835,34.29 66.858,34.313 66.858,35.489 67.021,35.652 ; J3.2@92.383,2.853 92.383,0.967 93,0.35 117.824,0.35 118,0.526 118,34.052 J7.2@117.762,34.29 117.508,34.29 115.73,32.512 94.013,32.512 J11.2@92.235,34.29 91.901,34.29 90.897,35.294 90.897,35.33 90.735,35.492 90.699,35.492 90.377,35.814 67.183,35.814 67.021,35.652
VBatt: C1.2 Q11.1 Q11.2 Q11.3 Q14.1 Q14.2 Q14.3 Q15.1 Q15.2 Q15.3 Q17.1 Q17.2 Q17.3 R43.2 R45.2 R52.2 R55.2 S1.2 U1.2 U1.3 | length 161.8
  Top Layer w1: C1.2@3.624,92.156 3.624,91.167 2.227,89.77 2.227,84.65 2.403,84.474 23.86,84.474 24.036,84.65 S1.2@24.036,108.504 S1.2@29.116,108.504
  Bottom Layer w3.5: v1@55.626,110.744 v1(88.646,110.744) v1(90.551,110.744) v1(129.032,110.744)
  Bottom Layer w5: S1.2@24.036,108.504 S1.2@29.116,108.504 52.578,108.504 v1@53.421,108.504
  other v1: 52.578,105.283 53.594,105.283 54.61,105.283 55.626,105.283 52.578,106.045 53.594,106.045 54.61,106.045 55.626,106.045 52.578,106.807 53.594,106.807 54.61,106.807 55.626,106.807 52.578,107.569 53.594,107.569 54.61,107.569 55.626,107.569 52.578,108.331 53.594,108.331 54.61,108.331 55.626,108.331 52.578,109.093 53.594,109.093 54.61,109.093 55.626,109.093 84.709,109.093 85.725,109.093 86.741,109.093 87.63,109.093 88.646,109.093 89.535,109.093 90.551,109.093 91.567,109.093 92.456,109.093 93.472,109.093 94.488,109.093 95.504,109.093 125.476,109.22 126.365,109.22 127.254,109.22 128.143,109.22 129.032,109.22 129.921,109.22 52.578,109.855 53.594,109.855 54.61,109.855 55.626,109.855 84.709,109.982 85.725,109.982 86.741,109.982 87.63,109.982 88.646,109.982 89.535,109.982 90.551,109.982 91.567,109.982 92.456,109.982 93.472,109.982 94.488,109.982 95.504,109.982 125.476,109.982 126.365,109.982 127.254,109.982 128.143,109.982 129.032,109.982 129.921,109.982 52.578,110.617 53.594,110.617 54.61,110.617 55.626,110.617 84.709,110.744 85.725,110.744 86.741,110.744 87.63,110.744 89.535,110.744 91.567,110.744 92.456,110.744 93.472,110.744 94.488,110.744 95.504,110.744 125.476,110.744 126.365,110.744 127.254,110.744 128.143,110.744 129.921,110.744 84.709,111.506 85.725,111.506 86.741,111.506 87.63,111.506 88.646,111.506 89.535,111.506 90.551,111.506 91.567,111.506 92.456,111.506 93.472,111.506 94.488,111.506 95.504,111.506 125.476,111.506 126.365,111.506 127.254,111.506 128.143,111.506 129.032,111.506 129.921,111.506
Vbus: USB-C.A4_B9 USB-C.B4_A9 | length 6.9
  Top Layer w0.3: USB-C.B4_A9@7.344,16.609 7.194,16.759 6.654,16.759 6.569,16.844 6.241,16.844 6.065,17.02 6.065,20.998 6.241,21.174 6.569,21.174 6.654,21.259 7.194,21.259 USB-C.A4_B9@7.344,21.409
pads on no net: AMS1117-3.3.4 DHT11.3 ESP32-S3.36 ESP32-S3.37 U6.1@61.45,6.745 U7.1@88.45,6.745 U8.1 U9.1 U10.1 U11.1 USB-C. USB-C.A8 USB-C.B8

## Polygon pours and split planes (outlines as drawn)
DGND on Top Layer "DGND_L01_P033" (solid, pour order 33): 1.016,74.422 1.27,74.422 51.308,74.422 51.308,60.96 51.268,61 1,61 1,74.406 1.016,74.422 1.778,74.422
5V on Top Layer "5V_L01_P019" (solid, pour order 19): 33.723,111.398 33.723,109.62 37.279,109.62 37.279,111.398
NetC14_1 on Top Layer "NETC14_1_L01_P018" (solid, pour order 18): 33.977,109.62 33.977,106.318 37.025,106.318 37.025,107.842 39.057,107.842 39.057,109.62
DGND on Top Layer "DGND_L01_P032" (solid, remove dead copper, pour order 32): 139,61 1,61 1,1 139,1
ALS on Top Layer "NONET_L01_P-001" (solid, pour order 49): 125.095,99.06 125.095,96.52 128.143,96.52 128.143,97.79 126.365,97.79 126.365,99.06
ALS on Top Layer "ALS_L01_P022" (solid, pour order 22): 40.835,88.284 40.835,84.093 47.693,84.093 47.693,88.284
VBatt on Top Layer "NONET_L01_P-001" (solid, pour order 46): 124.714,101.219 130.302,101.219 130.302,112.014 124.714,112.014
BHS on Top Layer "NONET_L01_P-001" (solid, remove dead copper, pour order 45): 124.333,108.331 124.333,90.17 110.871,90.17 110.871,108.331
AHS on Top Layer "NONET_L01_P-001" (solid, remove dead copper, pour order 44): 109.855,108.331 109.855,90.17 96.393,90.17 96.393,108.331
VBatt on Top Layer "NONET_L01_P-001" (solid, pour order 43): 96.012,101.727 85.979,101.727 84.455,101.727 84.455,111.887 96.012,111.887
BHS1 on Top Layer "NONET_L01_P-001" (solid, remove dead copper, pour order 42): 70.612,108.331 70.612,90.17 84.201,90.17 84.201,108.331
VBatt on Top Layer "NONET_L01_P-001" (solid, pour order 39): 52.324,110.998 52.324,110.871 52.324,101.371 54.61,101.371 54.61,101.028 56.07,101.028 56.07,110.998
AHS1 on Top Layer "NONET_L01_P-001" (solid, pour order 37): 56.388,108.331 56.388,90.17 69.85,90.17 69.85,108.331
NetC4_1 on Top Layer "NETC4_1_L01_P011" (solid, pour order 11): 20.007,96.539 20.007,92.094 13.276,92.094 13.022,91.84 13.022,91.078 10.945,91.078 10.863,91.16 10.863,92.602 12.302,92.602 12.514,93.237 12.514,96.539
ALS on Top Layer "ALS_L01_P000" (solid, remove dead copper, pour order 0): 1.846,107.08 4.894,107.08 4.894,104.794 5.148,104.54 10.482,104.54 10.482,103.524 10.482,92.856 10.736,92.602 10.736,85.998 10.228,85.49 7.434,85.49 7.434,87.014 8.196,87.776 8.196,93.618 7.434,94.38 4.386,94.38 4.386,92.856 1.846,92.856
ALS on Top Layer "ALS_L01_P035" (solid, remove dead copper, pour order 35): 53.213,96.52 53.213,95.25 54.737,95.25 54.991,95.504 54.991,96.266 55.372,96.647 56.261,96.647 56.261,98.425 56.134,98.552 55.245,98.552 54.991,98.298 54.991,97.282 54.229,96.52
ALS on Top Layer "ALS_L01_P020" (solid, pour order 20): 37.279,111.398 37.279,109.62 42.359,109.62 42.359,111.398
NetR4_1 on Top Layer "NETR4_1_L01_P017" (solid, pour order 17): 42.105,109.366 42.105,108.35 40.835,107.08 40.835,106.318 40.327,106.318 40.327,109.366
12V on Top Layer "12V_L01_P012" (solid, pour order 12): 39.819,105.81 39.819,104.794 39.311,104.032 39.311,99.46 40.835,99.46 40.835,104.032 40.327,105.048 40.327,105.81
ALS on Top Layer "ALS_L01_P013" (solid, pour order 13): 41.089,103.016 41.089,99.206 47.947,99.206 47.947,103.016
5V on Top Layer "5V_L01_P014" (solid, pour order 14): 48.201,111.652 48.201,99.206 51.503,99.206 51.503,111.652
NetC11_2 on Top Layer "NETC11_2_L01_P015" (solid, pour order 15): 47.693,105.048 41.851,105.048 41.851,105.81 40.835,105.81 40.835,105.048 40.327,105.048 40.327,106.318 41.597,106.318 42.105,106.826 43.883,106.826 44.391,107.334 44.391,111.652 47.693,111.652
ALS on Top Layer "ALS_L01_P016" (solid, pour order 16): 40.835,105.81 40.835,104.54 42.359,104.54 42.359,103.016 44.391,103.016 44.391,104.794 41.343,104.794 41.343,105.81
12V on Top Layer "12V_L01_P021" (solid, pour order 21): 40.708,84.347 40.708,89.808 40.454,90.062 40.327,90.189 40.327,91.332 39.819,91.332 39.819,90.189 39.438,89.808 39.438,84.347
3V3 on Top Layer "3V3_L01_P023" (solid, pour order 23): 47.947,97.555 47.947,84.093 51.249,84.093 51.249,97.555
ALS on Top Layer "ALS_L01_P024" (solid, pour order 24): 36.644,96.666 36.644,94.888 42.105,94.888 42.105,96.666
NetC22_2 on Top Layer "NETC22_2_L01_P026" (solid, pour order 26): 38.549,93.364 38.549,94.761 33.342,94.761 33.342,93.364 34.993,91.713 36.644,91.713 36.644,93.364
NetC19_2 on Top Layer "NETC19_2_L01_P027" (solid, pour order 27): 40.835,90.443 40.454,90.443 40.454,91.946 43.375,91.946 43.375,97.555 47.185,97.555 47.185,90.443 41.47,90.443 41.47,91.205 41.343,91.332 40.835,91.332
ALS on Top Layer "ALS_L01_P028" (solid, pour order 28): 40.835,91.332 40.835,90.062 42.74,90.062 42.74,88.284 43.502,88.284 43.502,90.316 41.343,90.316 41.343,91.332
3V3 on Top Layer "3V3_L01_P025" (solid, pour order 25): 33.215,96.031 33.215,94.507 36.39,94.507 36.517,94.634 36.517,96.031
VBatt on Top Layer "VBATT_L01_P010" (solid, pour order 10): 1.846,92.602 4.386,92.602 4.386,91.84 5.275,90.951 8.069,90.951 8.069,88.538 2.227,88.538 1.846,88.538
NetR1_1 on Top Layer "NETR1_1_L01_P009" (solid, remove dead copper, pour order 9): 10.863,88.665 10.863,89.554 10.773,89.859 13.403,89.935 14.8,89.935 14.8,88.665 14.546,88.665 14.8,88.665 14.546,88.665
12V on Top Layer "12V_L01_P008" (solid, pour order 8): 11.117,92.602 10.736,92.983 10.736,104.54 14.546,104.54 15.435,105.429 20.007,105.429 20.007,97.428 19.245,96.666 15.435,96.666 12.26,96.666 12.26,92.602
NetC3_2 on Top Layer "NETC3_2_L01_P007" (solid, pour order 7): 16.324,91.713 16.324,88.665 14.8,88.665 14.8,91.713 15.054,91.84 16.07,91.84
ALS on Top Layer "ALS_L01_P005" (solid, pour order 5): 10.482,91.956 10.921,91.078 12.768,91.078 12.895,91.078 13.149,91.078 13.149,91.713 14.8,91.713 14.8,89.935 13.403,89.935 13.149,89.681 10.482,89.681 10.482,90.062 10.482,90.951
NetR2_1 on Top Layer "NETR2_1_L01_P004" (solid, pour order 4): 10.863,88.411 10.863,85.49 14.038,85.49 14.038,88.411
NetC2_2 on Top Layer "NETC2_2_L01_P003" (solid, pour order 3): 5.656,88.284 5.656,85.49 7.18,85.49 7.434,85.744 7.434,86.76 7.434,87.014 7.942,87.776 7.942,88.284
"NetAkku Connector_1" on Top Layer "NETAKKU_CONNECTOR_1_L01_P002" (solid, remove dead copper, pour order 2): 1.846,110.001 1.846,107.334 5.021,107.334 5.308,107.047 5.883,106.472 15.908,106.472 15.908,110.001
NetC4_2 on Top Layer "NETC4_2_L01_P001" (solid, remove dead copper, pour order 1): 4.513,94.253 4.513,91.967 5.275,91.205 8.069,91.205 8.069,92.221 6.418,92.221 6.164,92.475 6.164,94.253
BHS1 on Bottom Layer "NONET_L01_P-001" (solid, pour order 41): 70.612,108.331 85.979,108.331 85.979,90.17 70.612,90.17
ALS on Bottom Layer "ALS_L02_P030" (solid, remove dead copper, pour order 30): 0.822,112.346 0.822,75.346 139.319,75.346 139.319,112.346
BHS on Bottom Layer "NONET_L01_P-001" (solid, pour order 52): 124.079,90.17 124.079,107.442 110.871,107.442 110.871,90.17
AHS on Bottom Layer "NONET_L01_P-001" (solid, pour order 51): 96.647,107.442 96.647,90.17 109.855,90.17 109.855,107.442
VBatt on Bottom Layer "NONET_L01_P-001" (solid, remove dead copper, pour order 50): 51.943,112.776 51.943,104.902 56.134,104.902 56.134,112.776
AHS1 on Bottom Layer "NONET_L01_P-001" (solid, pour order 38): 52.451,108.331 69.85,108.331 69.85,90.17 52.451,90.17
ALS on Bottom Layer "NONET_L01_P-001" (solid, remove dead copper, pour order 48): 139.319,75.346 139.319,61.722 52.07,61.722 51.943,61.849 51.943,75.311
BHS1 on Bottom Layer "NONET_L01_P-001" (solid, pour order 40): 70.612,108.331 84.201,108.331 84.201,90.17 70.612,90.17

## Silkscreen, mask and mechanical layers (free items; w line width, h text height)
Top Overlay:
  lines w0.254: 0.508,74.422 51.689,74.422 ; 51.7,112.6 51.7,61.4 139.446,61.4
Boardshape:
  the board outline again, w0.254

## Dimensions
140,113 to 140,0 on Dimensions
0,113 to 140,113 on Dimensions

## Text inside footprints (layer, text, board x,y; h text height)
C47: Top Overlay "+" at 72.923,73.758 h1.5 r270
C50: Top Overlay "+" at 112.293,73.758 h1.5 r270
LS1: Top Overlay "+" at 1.758,3.112 h1.27 r90; Top Overlay "-" at 13.018,3.112 h1.27 r90; Mechanical 13 "+" at 1.758,3.112 h1.27 r90; Mechanical 13 "-" at 13.018,3.112 h1.27 r90